# Altium PCB Bullseye Volume Board Rev 0.0.3.PcbDoc
Units mm, origin at the board's own origin, x right, y up, seen from the top; angles counter-clockwise.
Board outline 108 x 32 mm, 2 copper layers (Top Layer, Bottom Layer), stack 1.569 mm thick; 69 components, 40 nets, 173 pads, 101 vias.
Unrouted connection lines stored in the file: 21.
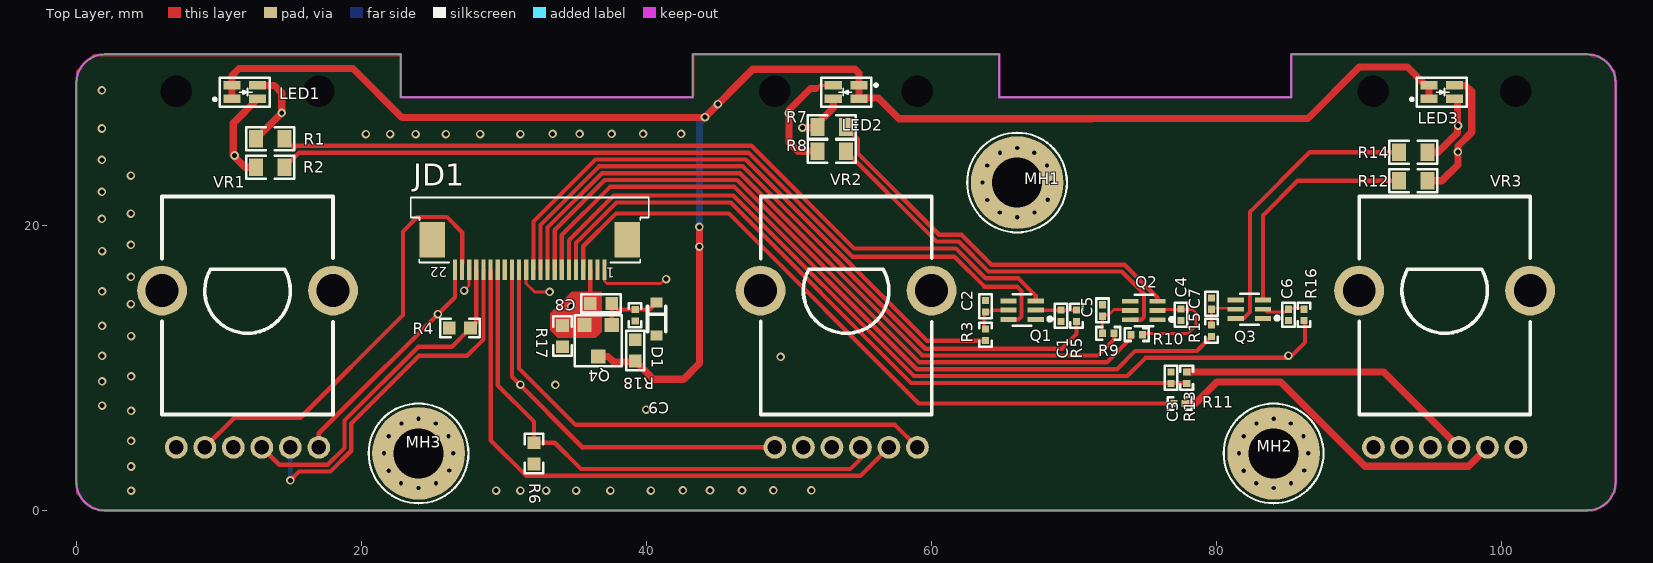
[diagram p0: Top Layer view]
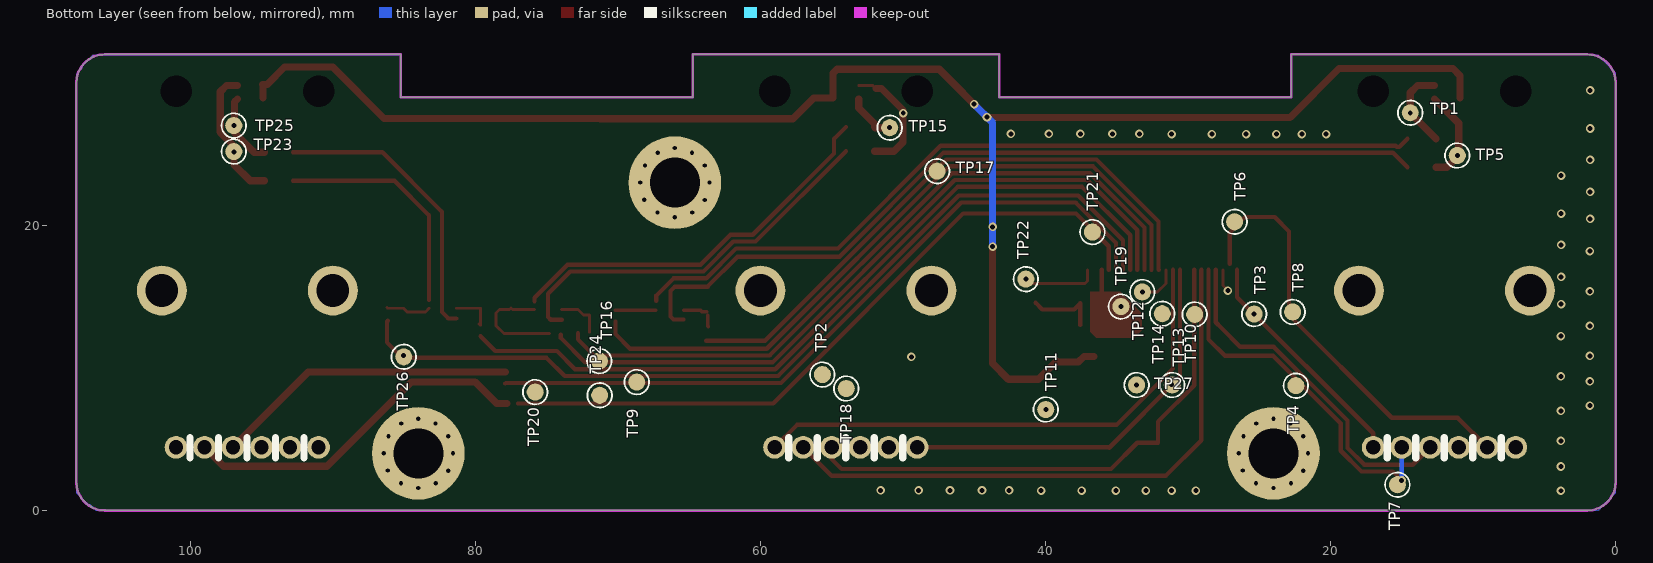
[diagram p1: Bottom Layer view, seen from below]
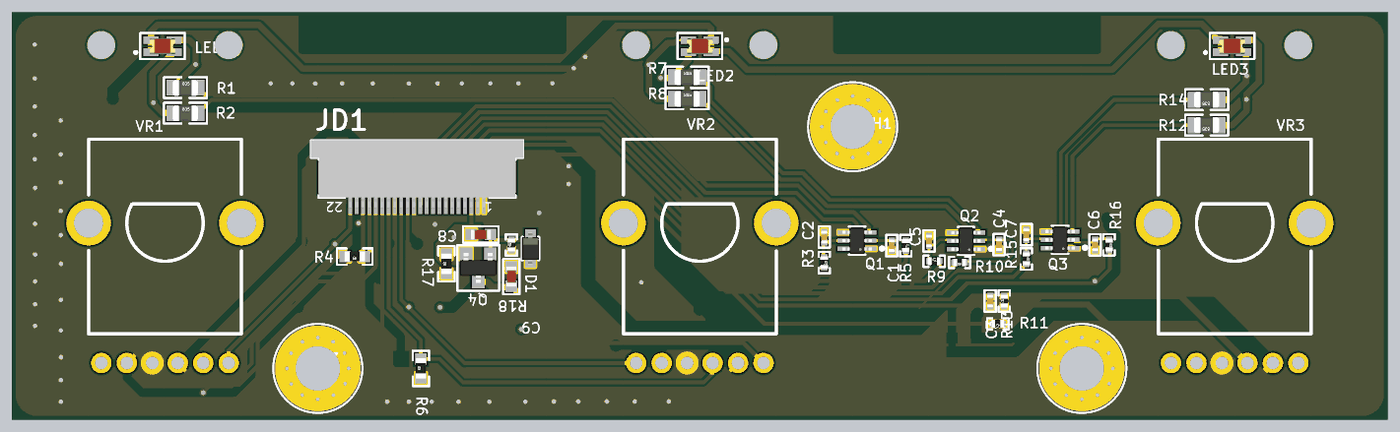
[diagram p2: 3D render of the assembled board from above, using the file's embedded part models]

## Layer stack, top to bottom
Top Solder: solder mask 0.0102, Solder Resist, Dk 3.5
Top Layer: signal copper 0.035
Dielectric 1: core 1.4986, Core-043, Dk 4.3
Bottom Layer: signal copper 0.035
Bottom Solder: solder mask 0.0102, Solder Resist, Dk 3.5

## Board outline
1.992,-0.007 cw(c1.992,1.993) -0.008,1.993 -0.008,29.993 cw(c1.992,29.993) 1.992,31.993 22.742,31.993 22.742,28.993 43.242,28.993 43.242,31.993 64.742,31.993 64.742,28.993 85.242,28.993 85.242,31.993 105.992,31.993 cw(c105.992,29.993) 107.992,29.993 107.992,1.993 cw(c105.992,1.993) 105.992,-0.007

## Design rules (kind name [scope] priority, off if disabled: settings)
Clearance [All] p1: gap=0.18
PolygonConnect VIA [All] p1: connectstyle=Direct reliefconductorwidth=0.254 reliefentries=4 polygonreliefangle="90 Angle" airgapwidth=0.254
PolygonConnect [All] p2: connectstyle=Relief reliefconductorwidth=0.254 reliefentries=4 polygonreliefangle="90 Angle" airgapwidth=0.254
RoutingVias [All] p1: holewidth=0.35 width=0.6 viastyle="Through Hole" minholewidth=0.3 minwidth=0.5 maxholewidth=0.5 maxwidth=0.8
SolderMaskExpansion [All] p1: expansion=0.102
Width [All] p1: maxlimit=1 minlimit=0.18 preferedwidth=0.2
30 further rules are at their usual default settings.

## Components (designator, comment, footprint, x,y, rotation, side; value= is the part's Value field where it differs from the comment)
C1 "PWL456470-1040" CAPC0402-RW 69.069,13.65 r270 top
C2 "PWL456470-1040" CAPC0402-RW 63.769,14.325 r90 top
C3 "PWL456470-1040" CAPC0402-RW 76.8,9.3 r90 top
C4 "PWL456470-1040" CAPC0402-RW 77.5,13.725 r270 top
C5 "PWL456470-1040" CAPC0402-RW 72,14.025 r90 top
C6 "PWL456470-1040" CAPC0402-RW 85.042,13.712 r270 top
C7 "PWL456470-1040" CAPC0402-RW 79.641,14.512 r90 top
C8 "PXL456420-4750" CAPC0603-RW 36.8,14.525 r0 top
C9 "PXL456470-1040" CAPC0603-RW 39.2,11.225 r270 top
D1 "RCD114148-0020" SOD-323 40.7,13.425 r90 top
JD1 "T690300139200" "CONN FFC 22P PH=0.5mm SMT RA 0.5S-1X-22PWT-5.4R" 31.8,19 r180 top
LED1 "KCD250001-0010" SMTLED2.0*1.25-RGB 11.8,29.343 r180 top
LED2 "KCD250001-0010" SMTLED2.0*1.25-RGB 54,29.343 r0 top
LED3 "KCD250001-0010" SMTLED2.0*1.25-RGB 95.8,29.343 r180 top
MH1 "MHOLE 3MM" "MHOLE 3.5MM W/Vias" 66,23 r0 top locked
MH2 "MHOLE 3MM" "MHOLE 3.5MM W/Vias" 84,4 r0 top locked
MH3 "MHOLE 3MM" "MHOLE 3.5MM W/Vias" 24,4 r0 top locked
Q1 "RCM027002-1001" SOT-363 66.346,14.05 r90 top
Q2 "RCM027002-1001" SOT-363 74.9,14.025 r90 top
Q3 "RCM027002-1001" SOT-363 82.292,14.112 r90 top
Q4 "T585002550438" SOT23-132-RW 36.6,11.9 r180 top
R1 "QCF081020-2000" 0805-RW 13.6,26.075 r0 top
R2 "QCF081020-1001" 0805-RW 13.6,24.075 r0 top
R3 "QCF161240-1002" 0402-RW 63.769,12.325 r270 top
R4 "RES0603 NC" 0603-RW 26.9,12.8 r180 top
R5 "QCF161240-1002" 0402-RW 70.169,13.65 r270 top
R6 "RES0603 NC" 0603-RW 32.1,4 r90 top
R7 "QCF081020-2000" 0805-RW 53,26.9 r0 top
R8 "QCF081020-1001" 0805-RW 53,25.2 r0 top
R9 "QCF161240-1002" 0402-RW 72.4,12.425 r0 top
R10 "QCF161240-1002" 0402-RW 74.4,12.325 r180 top
R11 "QCF161240-1000" 0402-RW 77.4,7.5 r180 top
R12 "QCF081020-2000" 0805-RW 93.8,23.125 r180 top
R13 "QCF161240-1000" 0402-RW 77.9,9.3 r90 top
R14 "QCF081020-1001" 0805-RW 93.8,25.125 r180 top
R15 "QCF161240-1002" 0402-RW 79.641,12.612 r270 top
R16 "QCF161240-1002" 0402-RW 86.142,13.712 r270 top
R17 "QCF011030-5101" 0603-RW 34.1,12.225 r90 top
R18 "T502200401399" 0402-RW 39.2,13.7 r90 top
TP1 "CH1_GN" TP_1.2mm 14.4,27.9 r180 bottom
TP2 "CH1_SIG" TP_1.2mm 55.65,9.525 r90 bottom
TP3 "CH1_GN" TP_1.2mm 25.35,13.775 r90 bottom
TP4 "CH1_GN" TP_1.2mm 22.425,8.75 r90 bottom
TP5 "CH1_RED" TP_1.2mm 11.1,24.9 r90 bottom
TP6 "CH1_GN" TP_1.2mm 26.725,20.25 r90 bottom
TP7 "CH1_GN" TP_1.2mm 15.3,1.8 r90 bottom
TP8 "CH1_GN" TP_1.2mm 22.65,13.925 r90 bottom
TP9 "CH1_LIM" TP_1.2mm 68.675,9 r90 bottom
TP10 "CH1_GN" TP_1.2mm 29.525,13.75 r90 bottom
TP11 "CH1_GN" TP_1.2mm 39.975,7.075 r90 bottom
TP12 "CH1_GN" TP_1.2mm 33.2,15.325 r90 bottom
TP13 "CH1_GN" TP_1.2mm 31.1,8.8 r90 bottom
TP14 "CH1_GN" TP_1.2mm 31.8,13.8 r90 bottom
TP15 "CH1_GN" TP_1.2mm 50.925,26.85 r90 bottom
TP16 "CH1_SIG" TP_1.2mm 71.3,10.475 r90 bottom
TP17 "CH1_RED" TP_1.2mm 47.6,23.8 r90 bottom
TP18 "CH1_LIM" TP_1.2mm 53.975,8.55 r90 bottom
TP19 "CH1_LIM" TP_1.2mm 34.7,14.3 r90 bottom
TP20 "CH1_LIM" TP_1.2mm 75.8,8.3 r90 bottom
TP21 "CH1_LIM" TP_1.2mm 36.7,19.525 r90 bottom
TP22 "CH1_LIM" TP_1.2mm 41.375,16.225 r90 bottom
TP23 "CH1_GN" TP_1.2mm 96.95,25.175 r90 bottom
TP24 "CH1_SIG" TP_1.2mm 71.275,8.075 r90 bottom
TP25 "CH1_RED" TP_1.2mm 96.95,27 r90 bottom
TP26 "CH1_LIM" TP_1.2mm 85.025,10.775 r90 bottom
TP27 "CH2_SIG" TP_1.2mm 33.6,8.8 r90 bottom
VR1 "T531230000320" R11122G-FA20B7-5C103-167 12,15.425 r0 top
VR2 "T531230000320" R11122G-FA20B7-5C103-167 54,15.425 r0 top
VR3 "T531220000419" RV112BCF-40-20A-B10K-0C 96,15.425 r0 top

## Footprints (in the part's own frame and the unit in brackets; to place one, negate y for a bottom-side part, rotate by r counter-clockwise, add the part's x,y. Pads: shape width x height; smd on the part's side, far side on the other; paste and mask are expansions set on the pad)
0402-RW [mm]
  rect 0.5x0.5 smd: 1(-0.4,0) 2(0.4,0)
  silkscreen extent -0.84,-0.44 0.84,0.44, body extent -0.5,-0.3 0.5,0.3, height 0.2
0603-RW [mm]
  rect 0.9x0.9 smd: 1(-0.75,0) 2(0.75,0)
  silkscreen extent -1.39,-0.64 1.39,0.64, body extent -0.8,-0.41 0.8,0.39, height 0.3
0805-RW [mm]
  rect 1x1.25 smd: 1(-1,0) 2(1,0)
  silkscreen extent -1.69,-0.82 1.69,0.82, body extent -1,-0.64 1,0.62, height 0.78
CAPC0402-RW [mm] "Body size: L1.0XW0.5mmXT0.5mm"
  rect 0.5x0.5 smd: 1(-0.4,0) 2(0.4,0)
  silkscreen extent -0.84,-0.44 0.84,0.44, body extent -0.5,-0.25 0.5,0.25, height 0.5
CAPC0603-RW [mm] "Body size:  L1.6XW0.8XT0.8mm"
  rect 0.9x0.9 smd: 1(-0.75,0) 2(0.75,0)
  silkscreen extent -1.39,-0.64 1.39,0.64, body extent -0.8,-0.4 0.8,0.4, height 0.8
"CONN FFC 22P PH=0.5mm SMT RA 0.5S-1X-22PWT-5.4R" [mm] "SMD FFC CONNECTOR 22P P=0.5mm RA SR"
  rect 1.8x2.5 smd: 0(-6.85,0) 0(6.85,0)
  rect 0.3x1.45 smd: 1(-5.25,2.125) 2(-4.75,2.125) 3(-4.25,2.125) 4(-3.75,2.125) 5(-3.25,2.125) 6(-2.75,2.125) 7(-2.25,2.125) 8(-1.75,2.125) 9(-1.25,2.125) 10(-0.75,2.125) 11(-0.25,2.125) 12(0.25,2.125) 13(0.75,2.125) 14(1.25,2.125) 15(1.75,2.125) 16(2.25,2.125) 17(2.75,2.125) 18(3.25,2.125) 19(3.75,2.125) 20(4.25,2.125) 21(4.75,2.125) 22(5.25,2.125)
  silkscreen extent -8.35,-2.95 8.35,1.6, body extent -8.35,-2.95 8.35,2.45, height 2
"MHOLE 3.5MM W/Vias" [mm] "MOUNT HOLE 3.5mm for SCREW 3.0mm"
  round 6.5 hole 3.5 unplated: 1(0,0)
  silkscreen extent -3.5,-3.5 3.5,3.5
R11122G-FA20B7-5C103-167 [mm] "R11122G-FA20B7-5C103-167"
  round 3.5 hole 2.3: 0(-6,0) 0(6,0)
  round 1.6 hole 1: 1(-3,-11) 1'(-1,-11) 2(-5,-11) 2'(1,-11) 3(5,-11) 3'(3,-11)
  silkscreen extent -6,-8.7 6,6.6, body extent -6,-11.15 6,6.6, height 20
RV112BCF-40-20A-B10K-0C [mm] "RV112BCF-40-20A-B10K-0C"
  round 3.5 hole 2.3: 0(-6,0) 0(6,0)
  round 1.6 hole 1: 1(-3,-11) 2(-5,-11) 3(5,-11) 4(-1,-11) 5(1,-11) 6(3,-11)
  silkscreen extent -6,-8.7 6,6.6, body extent -6,-11.15 6,6.6, height 20
SMTLED2.0*1.25-RGB [mm] "LED 0805 RGB L2mmXW1.25 mm H0.8mm"
  rect 1.2x0.6 smd: 1(0.9,0.475) 2(-0.9,0.475) 3(0.9,-0.475) 4(-0.9,-0.475)
  silkscreen extent -1.75,-1.02 2.2,1.02, body extent -1.01,-0.62 1.01,0.63, height 1.1
SOD-323 [mm] "SMD Body W 1.4mm L 1.8mm"
  rect 0.7x0.85 smd: 1(-1.15,0) 2(1.15,0)
  silkscreen extent -0.89,-0.64 0.89,0.64, body extent -1.3,-0.67 1.3,0.68, height 1.1
SOT23-132-RW [mm]
  rect 1x1 smd: 1(-0.95,-1.1) 2(0.95,-1.1) 3(0,1.1)
  silkscreen extent -1.65,-1.79 1.65,1.79, body extent -1.46,-1.17 1.46,1.17, height 1
SOT-363 [mm] "Body:2.0 x 1.25 mm, Height: 1.2mm, Pitch:0.65mm"
  rect 0.34x1.142 smd: 1(-0.65,-0.954) 2(0,-0.954) 3(0.65,-0.954) 4(0.65,0.954) 5(0,0.954) 6(-0.65,0.954)
  silkscreen extent -1.1,-2.05 1.1,0.65, body extent -1.05,-1.15 1.05,1.15, height 1
TP_1.2mm [mm]
  round 1.2 smd: 1(0,0)
  silkscreen extent -0.86,-0.86 0.86,0.86, body extent -0.6,-0.6 0.6,0.6, height 0.05

## Part data
C1 C2 C3 C4 C5 C6 C7: library part "CAP0402 0.1uF 50V 10%", "CAP, CER, 0.1uF, 10%, 50V, X7R, 0402, RoHS"
C8: library part "CAP0603 4.7uF 6.3V 10% - Walsin", "CHIP CAP 4.7uF 6.3V 10% 0603 TYPE X7R"
C9: library part "CAP0603 0.1uF 50V 10% - PXL456470-1040", "GP CHIP CAP 0.1uF 50V 10% 0603 TYPE X7R"
D1: library part 1N4148WS, "DIODE SW 1N4148 VF=0.7V SOD-323"
JD1: library part "CONN FFC 22P PH=0.5mm SMT RA 0.5S-1X-22PWT-5.4R", "22P P=0.5MM 180 K"
LED1 LED2 LED3: library part MS-PTB2012CURSGAC, "SMD LED 2.0x1.25mm MS-PTB2012CURSGAC  RED/GREEN"
MH1 MH2 MH3: "MOUNTING HOLE FOR 3MM SCREW"
Q1 Q2 Q3: library part 2N7002DW, "SMD MOSFET N-CH SOT-363 2N7002DW      Fairchild"
Q4: library part DMP3099L-7, "PMOS 20V DMP3099L-7 SOT23 DIODES K"
R1 R7 R12: library part "RES0805 1/8W 1% 200 OHM", "GP CHIP RES. 200 OHM 1/8W 1% 0805"
R2 R8 R14: library part "RES0805 1/8W 1% 1K OHM", "GP CHIP RES. 1K OHM 1/8W 1% 0805"
R3 R5 R9 R10 R15 R16: library part "RES0402 1/16W 1% 10K OHM", "CHIP RES 10K OHM 1/16W 1% 0402"
R4 R6: "NC"
R11 R13: library part "RES0402 1/16W 1% 100 OHM", "CHIP RES 100 OHM 1/16W 1% 0402"
R17: library part "RES0603 1/10W 1% 5.1K OHM", "GP CHIP RES. 5.1K OHM 1/10W 1% 0603"
R18: library part "RES0402 1/16W 1% 2M OMH_WALSIN", "CHIP 2M OHM    100PPM +-1% 0402 WALS L"
TP1 TP2 TP3 TP4 TP5 TP6 TP7 TP8 TP9 TP10 TP11 TP12 TP13 TP14 TP15 TP16 TP17 TP18 TP19 TP20 TP21 TP22 TP23 TP24 TP25 TP26 TP27: library part TP, "TP"
VR1 VR2: library part R11122G-FA20B7-5C103-167, "VR CA 10K C L=20MM R11122G-F K"
VR3: library part RV112BCF-40-20A-B10K-0C, "VR CA 10K B 15.4X13MM RV112BCF- K"

## Free pads (board coordinates)
  rect 0x0 hole 2.2: 2(6.992,29.418) 3(16.992,29.418) 4(48.992,29.418) 5(58.992,29.418) 6(90.992,29.418) 7(100.992,29.418)

## Via types
v1: diameter 0.6, hole 0.35, Top Layer to Bottom Layer, tented both sides, 65 vias
v2: diameter 0.5, hole 0.3, Top Layer to Bottom Layer, tented both sides, 36 vias

## Nets (pads, with @x,y where several pads share a name; then routed paths per layer and width w, separated by ;. In a path a pad name is that pad's centre, name@x,y a point inside that pad or via, vN(x,y) a via of type N, cw(c..) or ccw(c..) an arc to the next point about the centre after c; other vN are vias at no path point)
3.3V_LED1: C9.2 LED1.1 LED1.3 LED2.1 LED2.3 LED3.1 LED3.3 Q4.3 TP27.1 | length 122.4
  Top Layer w0.5: LED1.1@10.9,28.943 LED1.3 10.9,30.5 11.4,31 19.4,31 22.825,27.575 44.075,27.575 47.45,30.95 54.625,30.95 54.9,30.675 54.9,28.943 56.257,28.943 57.72,27.48 71.248,27.48 71.268,27.5 86.4,27.5 90,31.1 93.393,31.1 94.6,29.893 LED3.3@94.85,29.893 ; Q4.3 37.3,10.8 37.7,10.4 39.125,10.4 C9.2 40.475,9.2 42.602,9.2 43.7,10.298 v1(43.7,18.5) v1(43.7,19.9) ; LED3.3@94.8,29.843 LED3.3@94.85,29.893 ; LED3.1@94.9,28.943 LED3.3@94.9,29.843 ; LED3.3@94.925,29.893 LED3.3@94.85,29.893
  Bottom Layer w0.5: v1(43.7,18.5) 43.7,27.2 v1(45,28.5)
  other v1: 33.6,8.8 44.1,27.6
AUXIN_VOL1: C3.1 JD1.5 R13.1 TP21.1 | length 52.2
  Top Layer w0.2: C3.1 R13.1@77.825,8.9
  Top Layer w0.3: JD1.5 35.05,18.771 37.879,21.6 45.9,21.6 58.555,8.945 77.855,8.945 R13.1
D1.2V: JD1.4 R11.2 TP20.1 | length 49.6
  Top Layer w0.3: JD1.4 35.55,18.532 37.846,20.828 45.772,20.828 59.1,7.5 R11.2
GND: C1.2 C2.2 C3.2 C4.2 C5.2 C6.2 C7.2 C9.1 D1.1 JD1.1 JD1.2 JD1.12 JD1.15 JD1.20 MH1.1 MH2.1 MH3.1 Q1.1 Q1.4 Q2.1 Q2.4 Q3.1 Q3.4 R4.2 R6.1 R17.1 R18.1 TP6.1 TP12.1 TP22.1 VR1.1' VR2.1' VR3.4 | length 9.8
  Top Layer w0.2: v1(27.2,15.425) 27.55,15.775 JD1.20 ; JD1.12 31.55,15.925 32.15,15.325 v1(33.2,15.325) ; JD1.1 37.05,16.1 37.225,15.925 41,15.925 v1@41.425,16.35
  other v1: 3.826,1.377 29.444,1.381 31.144,1.381 32.944,1.381 35.052,1.381 37.465,1.381 40.294,1.381 42.545,1.397 44.45,1.397 46.694,1.397 48.895,1.397 51.562,1.397 3.826,3.077 3.826,4.877 3.826,6.985 1.794,7.346 1.794,9.046 3.826,9.398 49.4,10.775 1.794,10.846 3.826,12.227 1.794,12.954 3.81,14.478 1.794,15.367 41.375,16.225 3.81,16.383 1.794,18.196 3.81,18.627 1.778,20.447 3.81,20.828 1.778,22.352 3.81,23.495 1.778,24.596 20.3,26.4 22,26.4 23.8,26.4 25.908,26.4 28.321,26.4 31.15,26.4 33.401,26.416 35.306,26.416 37.55,26.416 39.751,26.416 42.418,26.416 1.778,26.797 1.778,29.464
  other v2: 24,1.575 84,1.575 22.775,1.9 25.225,1.9 82.775,1.9 85.225,1.9 21.9,2.775 81.9,2.775 26.15,2.8 86.15,2.8 21.575,4 26.425,4 81.575,4 86.425,4 21.9,5.2 26.1,5.2 81.9,5.2 86.1,5.2 22.8,6.1 25.2,6.1 82.8,6.1 85.2,6.1 24,6.425 84,6.425 66,20.575 64.775,20.9 67.225,20.9 63.9,21.775 68.15,21.8 63.575,23 68.425,23 63.9,24.2 68.1,24.2 64.8,25.1 67.2,25.1 66,25.425
M3V3: C8.1 JD1.3 Q4.2 R17.2 TP19.1 | length 2.5
  Top Layer w0.3: C8.1 JD1.3
  Top Layer w0.5: C8.1@36.05,14.533 C8.1 C8.1@36.183,14.525
  other v1: 34.7,14.3
NetC1_1: C1.1 Q1.2 R5.1 | length 2.8
  Top Layer w0.25: Q1.2@67.35,14.05 C1.1 R5.1
NetC2_1: C2.1 Q1.5 R3.1 | length 2.5
  Top Layer w0.25: R3.1@63.646,12.875 63.696,12.925 C2.1@63.696,13.7 ; C2.1 64.075,13.925 64.2,14.05 Q1.5
NetC4_1: C4.1 Q2.2 R10.1 | length 7.8
  Top Layer w0.2: R10.1@74.8,12.4 78,12.4 78.55,12.95 78.55,13.85 78.3,14.1 77.6,14.1 77.5,14.2 77.4,14.1 Q2.2@75.854,14.1
NetC5_1: C5.1 Q2.5 R9.1 | length 3.3
  Top Layer w0.2: R9.1@72,12.5 72,13.7 72.4,13.7 72.8,14.1 Q2.5@73.946,14.1
NetC6_1: C6.1 Q3.2 R16.1 | length 3.2
  Top Layer w0.2: Q3.2@83.246,14.187 83.508,13.925 84.779,13.925 85.042,14.187 86.142,14.187 R16.1@86.192,14.237
NetC7_1: C7.1 Q3.5 R15.1 | length 3
  Top Layer w0.2: R15.1@79.741,13.087 79.641,12.987 79.641,14.187 Q3.5@81.338,14.187
NetC8_2: C8.2 D1.2 Q4.1 R18.2 | length 5
  Top Layer w0.3: Q4.1 C8.2 37.975,14.1 R18.2 40.225,14.1 D1.2
NetJD1_6: JD1.6 R16.2 TP26.1 | length 62.8
  Top Layer w0.3: JD1.6 34.55,18.95 37.7,22.1 46.079,22.1 58.754,9.425 73.725,9.425 75,10.7 85.108,10.7 86.196,11.787 86.196,13.258 R16.2
  other v1: 85.025,10.85
NetJD1_7: JD1.7 R15.2 TP24.1 | length 55.7
  Top Layer w0.3: JD1.7 34.05,19.28 34.03,19.3 37.43,22.7 46.158,22.7 58.953,9.905 73.005,9.905 74.28,11.18 78.609,11.18 R15.2
NetJD1_8: JD1.8 R10.2 TP18.1 | length 50.9
  Top Layer w0.3: JD1.8 33.55,19.65 33.541,19.659 37.063,23.18 46.356,23.18 59.151,10.385 72.285,10.385 74,12.1 R10.2
NetJD1_9: JD1.9 R9.2 TP16.1 | length 50.5
  Top Layer w0.3: JD1.9 33.05,19.846 36.864,23.66 46.555,23.66 59.35,10.865 71.665,10.865 72.8,12 R9.2
NetJD1_10: JD1.10 R5.2 TP9.1 | length 49.1
  Top Layer w0.3: JD1.10 32.55,20.025 36.665,24.14 46.754,24.14 59.549,11.345 69.145,11.345 70.169,12.369 R5.2
NetJD1_11: JD1.11 R3.2 TP2.1 | length 42.2
  Top Layer w0.3: JD1.11 32.07,16.895 32.07,20.27 36.42,24.62 46.953,24.62 59.673,11.9 R3.2@63.8,11.9
NetLED1_2: LED1.2 R2.1 TP5.1 | length 6.6
  Top Layer w0.5: R2.1 11.825,24.075 11,24.9 11,27.168 LED1.2
  other v1: 11.1,24.9
NetLED1_4: LED1.4 R1.1 TP1.1 | length 5.9
  Top Layer w0.5: R1.1 14.4,27.875 v1(14.4,27.9) 14.4,29.3 13.882,29.818 LED1.4
NetLED2_2: LED2.2 R8.1 TP17.1 | length 8.3
  Top Layer w0.2: 51.9,29.6 52.118,29.818 LED2.2
  Top Layer w0.5: 51.9,29.6 51.5,29.6 50,28.1 50,25.825 50.625,25.2 R8.1
  other v1: 49.975,27.875
NetLED2_4: LED2.4 R7.1 TP15.1 | length 3.5
  Top Layer w0.5: v1(50.925,26.85) 51.95,26.85 R7.1 52,27.125 53.1,28.225 LED2.4
NetLED3_2: LED3.2 R14.1 TP25.1 | length 7.4
  Top Layer w0.2: LED3.2@96.7,28.943 LED3.2@96.737,28.905 ; 96.9,26.5 LED3.2@96.9,28.743
  Top Layer w0.5: R14.1 95.525,25.125 96.9,26.5 96.9,28.668 LED3.2
  other v1: 96.95,27
NetLED3_4: LED3.4 R12.1 TP23.1 | length 9.5
  Top Layer w0.5: R12.1 95.8,23.125 96.925,24.25 v1(96.925,25.15) 96.925,25.563 97.9,26.538 97.9,29.375 97.457,29.818 LED3.4
NetQ1_3: Q1.3 R1.2 | length 57.7
  Top Layer w0.3: R1.2 15.175,25.5 15.346,25.5 15.426,25.58 47.351,25.58 54.552,18.379 61.7,18.379 63.8,16.279 66.1,16.279 67.3,15.079 Q1.3
NetQ1_6: Q1.6 R2.2 | length 58.9
  Top Layer w0.3: R2.2 15.625,25.1 47.152,25.1 54.452,17.8 61.6,17.8 63.7,15.7 66,15.7 66.3,15.4 66.3,13.6 66.1,13.4 Q1.6
NetQ2_3: Q2.3 R7.2 | length 27.7
  Top Layer w0.3: R7.2 54.83,26.07 54.83,25.049 60.54,19.339 62.098,19.339 64.198,17.239 73.54,17.239 75.854,14.925 Q2.3
NetQ2_6: Q2.6 R8.2 | length 27.7
  Top Layer w0.3: R8.2 60.341,18.859 61.899,18.859 63.999,16.759 73.341,16.759 74.9,15.2 74.9,13.562 74.713,13.375 Q2.6
NetQ3_3: Q3.3 R12.2 | length 16.5
  Top Layer w0.3: Q3.3 83.246,20.7 85.671,23.125 R12.2
NetQ3_6: Q3.6 R14.2 | length 20.4
  Top Layer w0.3: Q3.6 81.895,13.462 82.345,13.912 82.345,20.945 86.525,25.125 R14.2
NetR11_1: R11.1 VR3.6 | length 25
  Top Layer w0.18: VR3.6@98.9,4.6 VR3.6@99,4.5
  Top Layer w0.5: R11.1 78.5,7.5 80.02,9.02 84.48,9.02 90.4,3.1 97.675,3.1 VR3.6
NetR13_2: R13.2 VR3.5 | length 21.3
  Top Layer w0.5: R13.2 91.725,9.7 VR3.5
POT12: JD1.21 TP4.1 VR1.1 VR1.2 | length 30.8
  Top Layer w0.3: VR1.1 11.075,6.5 15.7,6.5 22.9,13.7 22.9,19.567 23.913,20.58 25.987,20.58 27.07,19.497 JD1.21@27.07,17.3
POT13: JD1.22 TP3.1 VR1.3 | length 16.4
  Top Layer w0.3: VR1.3 17,5.409 26.55,14.959 JD1.22
  other v1: 25.35,13.775
POT15: JD1.19 R4.1 TP8.1 VR1.2' | length 24.5
  Top Layer w0.3: VR1.2' 14.225,3.2 17.621,3.2 18.8,4.379 18.8,6.3 23.975,11.475 26.325,11.475 R4.1 28.05,13.2 JD1.19
POT16: JD1.18 TP7.1 VR1.3' | length 26
  Top Layer w0.3: v1(15,2.1) 15.62,2.72 17.82,2.72 19.28,4.18 19.28,6.101 24.029,10.85 27.4,10.85 28.55,12 JD1.18
  Bottom Layer w0.3: v1(15,2.1) VR1.3'
POT22: JD1.14 TP13.1 VR2.1 VR2.2 | length 28
  Top Layer w0.3: JD1.14 30.55,9.375 35.525,4.4 35.55,4.425 VR2.2
  other v1: 31.15,8.825
POT23: JD1.13 TP14.1 VR2.3 | length 37.7
  Top Layer w0.3: JD1.13 31.05,9.955 35.005,6 57.425,6 VR2.3
  Bottom Layer w0.3: VR2.3 VR2.3@59.4,4.025
POT25: JD1.16 R6.2 TP10.1 VR2.2' | length 38
  Top Layer w0.3: JD1.16 29.55,8.775 32.1,6.225 R6.2 33.55,4.75 35.4,2.9 54.3,2.9 55,3.6 VR2.2'
POT26: JD1.17 TP11.1 VR2.3' | length 41.8
  Top Layer w0.3: JD1.17 29.07,16.855 29.07,4.913 31.563,2.42 54.995,2.42 VR2.3'
  other v1: 39.975,7.075
pads on no net: JD1.0 VR1.0 VR2.0 VR3.0 VR3.1 VR3.2 VR3.3

## Polygon pours and split planes (outlines as drawn)
GND on Bottom Layer "Buttom Layer to GND" (solid, remove dead copper, shelved, pour order 9): 1.7,31.971 1.251,31.971 0.22,30.94 0,30.72 0,1.889 0,1.197 0.876,0.322 1.211,-0.014 2.1,-0.014 106.599,-0.014 106.758,0.145 107.009,0.396 107.2,0.396 107.2,0.426 107.655,0.881 107.981,1.207 107.981,1.79 107.981,30.63 107.849,30.762 107.6,31.011 107.6,31.186 107.586,31.186 107.109,31.664 106.809,31.964 106.384,31.964 85.277,31.964 85.242,31.998 85.242,28.993 64.75,28.993 64.742,29 64.742,31.993 43.242,31.993 43.242,28.993 22.85,28.993 22.742,29.1 22.742,31.993 1.629,31.993 1.6,31.964
GND on Top Layer "Top Layer to GND" (solid, remove dead copper, shelved, pour order 7): 1.6,31.964 1.16,31.964 0.396,31.2 -0.008,30.796 -0.008,1.796 -0.008,1.218 0.329,0.881 1.111,0.1 1.342,0.1 1.522,0.1 1.6,0.022 1.622,0 3.7,0 15.7,0 15.708,0.008 106.2,0.008 106.633,0.008 106.761,0.136 106.926,0.3 107.068,0.3 107.142,0.3 107.413,0.572 107.676,0.834 107.676,0.9 107.676,1.008 107.8,1.132 107.963,1.295 107.963,1.601 107.963,30.373 107.954,30.383 107.954,30.805 107.655,31.104 106.959,31.8 106.854,31.8 106.381,31.8 106.2,31.981 106.189,31.993 85.242,31.993 85.242,28.993 85.235,29 64.742,29 64.742,31.993 43.3,31.993 43.3,29.05 43.242,28.993 22.742,28.993 22.742,31.992 22.742,31.993 22.599,31.849 1.223,31.849

## Keep-outs
Keep-Out Layer:
  lines w0.18: -0.012,1.993 -0.014,30.005 0.021,30.385 0.136,30.762 0.321,31.109 0.571,31.414 0.876,31.664 1.223,31.849 1.6,31.964 1.992,31.993 22.742,31.993 22.742,28.993 43.242,28.993 43.242,31.993 64.742,31.993 64.742,28.993 85.242,28.993 85.242,31.998 106.005,32 106.384,31.964 106.761,31.849 107.109,31.664 107.413,31.414 107.663,31.109 107.849,30.762 107.963,30.385 107.992,29.992 ; -0.008,1.993 0.021,1.601 0.136,1.224 0.321,0.876 0.571,0.572 0.876,0.322 1.223,0.136 1.6,0.022 1.98,-0.014 105.992,-0.012 ; 105.992,-0.007 106.384,0.022 106.761,0.136 107.109,0.322 107.413,0.572 107.663,0.876 107.849,1.224 107.963,1.601 107.999,1.98 107.997,29.993

## Other copper
Top Layer:
  region net M3V3: 36.85,15.325 36.85,12.525 36.45,12.125 33.75,12.125 33.25,12.625 33.25,13.825 34.75,15.325

## Silkscreen, mask and mechanical layers (free items; w line width, h text height)
Mechanical 1:
  drawing of 368 lines, arcs and shapes, not listed
Mechanical 2:
  circle w0.1: c1.992,31.993 r0.05
  circle w0.1: c107.992,1.993 r0.05
Mechanical 4:
  lines w0.18: 224.981,-45.548 233.113,-45.548 ; 231.354,-49.614 231.354,-41.482 ; 234.08,-45.548 253.822,-45.548

## Text inside footprints (layer, text, board x,y; h text height)
JD1: Top Overlay "1" at 37.775,17.025 h0.7 r180; Top Overlay "22" at 26.025,17.05 h0.7 r180